# EAGLE board Design File (EAGLE 9.7.0)

Size 292.66 x 81.46 mm. Coordinates in mm from the lower left corner, seen from the top.
Outline: 0,0 292.66,0 292.66,81.46 0,81.46 0,0
Copper layers (1*16): Top 0.035mm / dielectric 1.5mm / Bottom 0.035mm
Design rules "default": minimum track width 6mil, minimum drill 0.35mm, track to track 6mil, track to pad 6mil, pad to pad 6mil, via to via 6mil, smd to smd 6mil, copper to edge 40mil, drill to drill 6mil, minimum pad ring 10mil, minimum via ring 8mil, stop-mask expansion 4mil, vias tented up to drill 0mil, thermal gap 10mil

## Footprints (pad centres in the part's own frame; a part is rotated, then mirrored left to right if it is on the bottom)
LEDRD254W60D565H860B = drill 0.981 pad 1.581: 1 -1.27,0; 2 1.27,0
PIEZO = drill 1 pad 1.6: 1 -3.5,0; 2 3.5,0
RESAD1016W63L850D250B = drill 0.83 pad 1.43: 1 -5.08,0; 2 5.08,0
SWITCH-MOMENTARY-PTH-6.5MM = drill 1.016 pad 1.88: 1 -3.251,2.261; 2 3.251,2.261; 3 -3.251,-2.261; 4 3.251,-2.261
ARDUINO-UNO-R3-SHIELD = drill 1.016 pad 1.88: 3.3V 24.13,-2.54; 5V 24.13,0; A0 24.13,12.7; A1 24.13,15.24; A2 24.13,17.78; A3 24.13,20.32; A4 24.13,22.86; A5 24.13,25.4; AREF -24.13,-13.97; D2 -24.13,20.32; D3 -24.13,17.78; D4 -24.13,15.24; D5 -24.13,12.7; D6 -24.13,10.16; D7 -24.13,7.62; D8 -24.13,3.81; D9 -24.13,1.27; D10 -24.13,-1.27; D11 -24.13,-3.81; D12 -24.13,-6.35; D13 -24.13,-8.89; GND@0 24.13,2.54; GND@1 24.13,5.08; GND@2 -24.13,-11.43; IOREF 24.13,-7.62; NC 24.13,-10.16; RES 24.13,-5.08; RX -24.13,25.4; SCL -24.13,-19.05; SDA -24.13,-16.51; TX -24.13,22.86; VIN 24.13,7.62

## Placement (x,y rotation side)
D1  RED  [LEDRD254W60D565H860B]  101.78,41.33 180 top
D2  RED  [LEDRD254W60D565H860B]  117.02,41.33 180 top
D3  RED  [LEDRD254W60D565H860B]  132.26,41.33 180 top
D4  RED  [LEDRD254W60D565H860B]  147.5,41.33 180 top
D5  RED  [LEDRD254W60D565H860B]  162.74,41.33 180 top
PIEZO1  PIEZO  [PIEZO]  280.93,67.88 0 top
R1  1k  [RESAD1016W63L850D250B]  100.51,28.63 90 top
R2  1k  [RESAD1016W63L850D250B]  115.75,28.63 90 top
R3  1k  [RESAD1016W63L850D250B]  130.99,28.63 90 top
R4  1k  [RESAD1016W63L850D250B]  146.23,28.63 90 top
R5  1k  [RESAD1016W63L850D250B]  161.47,28.63 90 top
R6  1k  [RESAD1016W63L850D250B]  179.25,28.63 90 top
R7  1k  [RESAD1016W63L850D250B]  189.41,28.63 90 top
R8  1k  [RESAD1016W63L850D250B]  209.73,28.63 90 top
R9  1k  [RESAD1016W63L850D250B]  224.97,28.63 90 top
R10  1k  [RESAD1016W63L850D250B]  242.75,28.63 90 top
R11  1k  [RESAD1016W63L850D250B]  255.45,28.63 90 top
S1  SWITCH_MOMENTARY  [SWITCH-MOMENTARY-PTH-6.5MM]  191.95,37.52 90 top
S2  SWITCH_MOMENTARY  [SWITCH-MOMENTARY-PTH-6.5MM]  212.27,37.52 90 top
S3  SWITCH_MOMENTARY  [SWITCH-MOMENTARY-PTH-6.5MM]  227.51,37.52 90 top
S4  SWITCH_MOMENTARY  [SWITCH-MOMENTARY-PTH-6.5MM]  245.29,37.52 90 top
S5  SWITCH_MOMENTARY  [SWITCH-MOMENTARY-PTH-6.5MM]  181.79,37.52 90 top
U1  ARDUINO-UNO-R3-SHIELD  [ARDUINO-UNO-R3-SHIELD]  47.88,29.84 270 top

## Library data of the parts
D1-D5 = Tinkercad; CATEGORY: Opto-Electronic; SUB-CATEGORY: LED; VALUE: LED_RED
PIEZO1 R1-R11 S1-S5 U1 = Tinkercad

## Nets
D1_C: D1.2 R1.2
D2_C: D2.2 R2.2
D3_C: D3.2 R3.2
D4_C: D4.2 R4.2
D5_C: D5.2 R5.2
PIEZO1_2: PIEZO1.2 R11.1
U1_5V: S1.3 S1.4 S2.3 S2.4 S3.3 S3.4 S4.3 S4.4 S5.3 S5.4 U1.5V
U1_D2: D1.1 U1.D2
U1_D3: D2.1 U1.D3
U1_D4: D3.1 U1.D4
U1_D5: D4.1 U1.D5
U1_D6: D5.1 U1.D6
U1_D7: R6.2 S5.1 S5.2 U1.D7
U1_D8: R7.2 S1.1 S1.2 U1.D8
U1_D9: R8.2 S2.1 S2.2 U1.D9
U1_D10: R9.2 S3.1 S3.2 U1.D10
U1_D11: R10.2 S4.1 S4.2 U1.D11
U1_D12: R11.2 U1.D12
U1_GND: PIEZO1.1 R1.1 R2.1 R3.1 R4.1 R5.1 R6.1 R7.1 R8.1 R9.1 R10.1 U1.GND@0 U1.GND@1 U1.GND@2

## Tracks (layer width: path | path; a pad name or v marks a point on that pad's centre or on a via)
D1_C  (1 unrouted)
D2_C  (1 unrouted)
D3_C  (1 unrouted)
D4_C  (1 unrouted)
D5_C  (1 unrouted)
PIEZO1_2  (1 unrouted)
U1_5V  (10 unrouted)
U1_D2  (1 unrouted)
U1_D3  (1 unrouted)
U1_D4  (1 unrouted)
U1_D5  (1 unrouted)
U1_D6  (1 unrouted)
U1_D7  (3 unrouted)
U1_D8  (3 unrouted)
U1_D9  (3 unrouted)
U1_D10  (3 unrouted)
U1_D11  (3 unrouted)
U1_D12  (1 unrouted)
U1_GND  (13 unrouted)